# Altium PCB PCB1.PcbDoc (part 2 of 2)
Units mil, origin at the board's own origin, x right, y up, seen from the top; angles counter-clockwise.
Board outline 3110.24 x 2637.8 mil, 4 copper layers (Top Layer, GND, PWR, Bottom Layer), stack 30.634 mil thick; 256 components, 133 nets, 699 pads, 60 vias.
Unrouted connection lines stored in the file: 3.
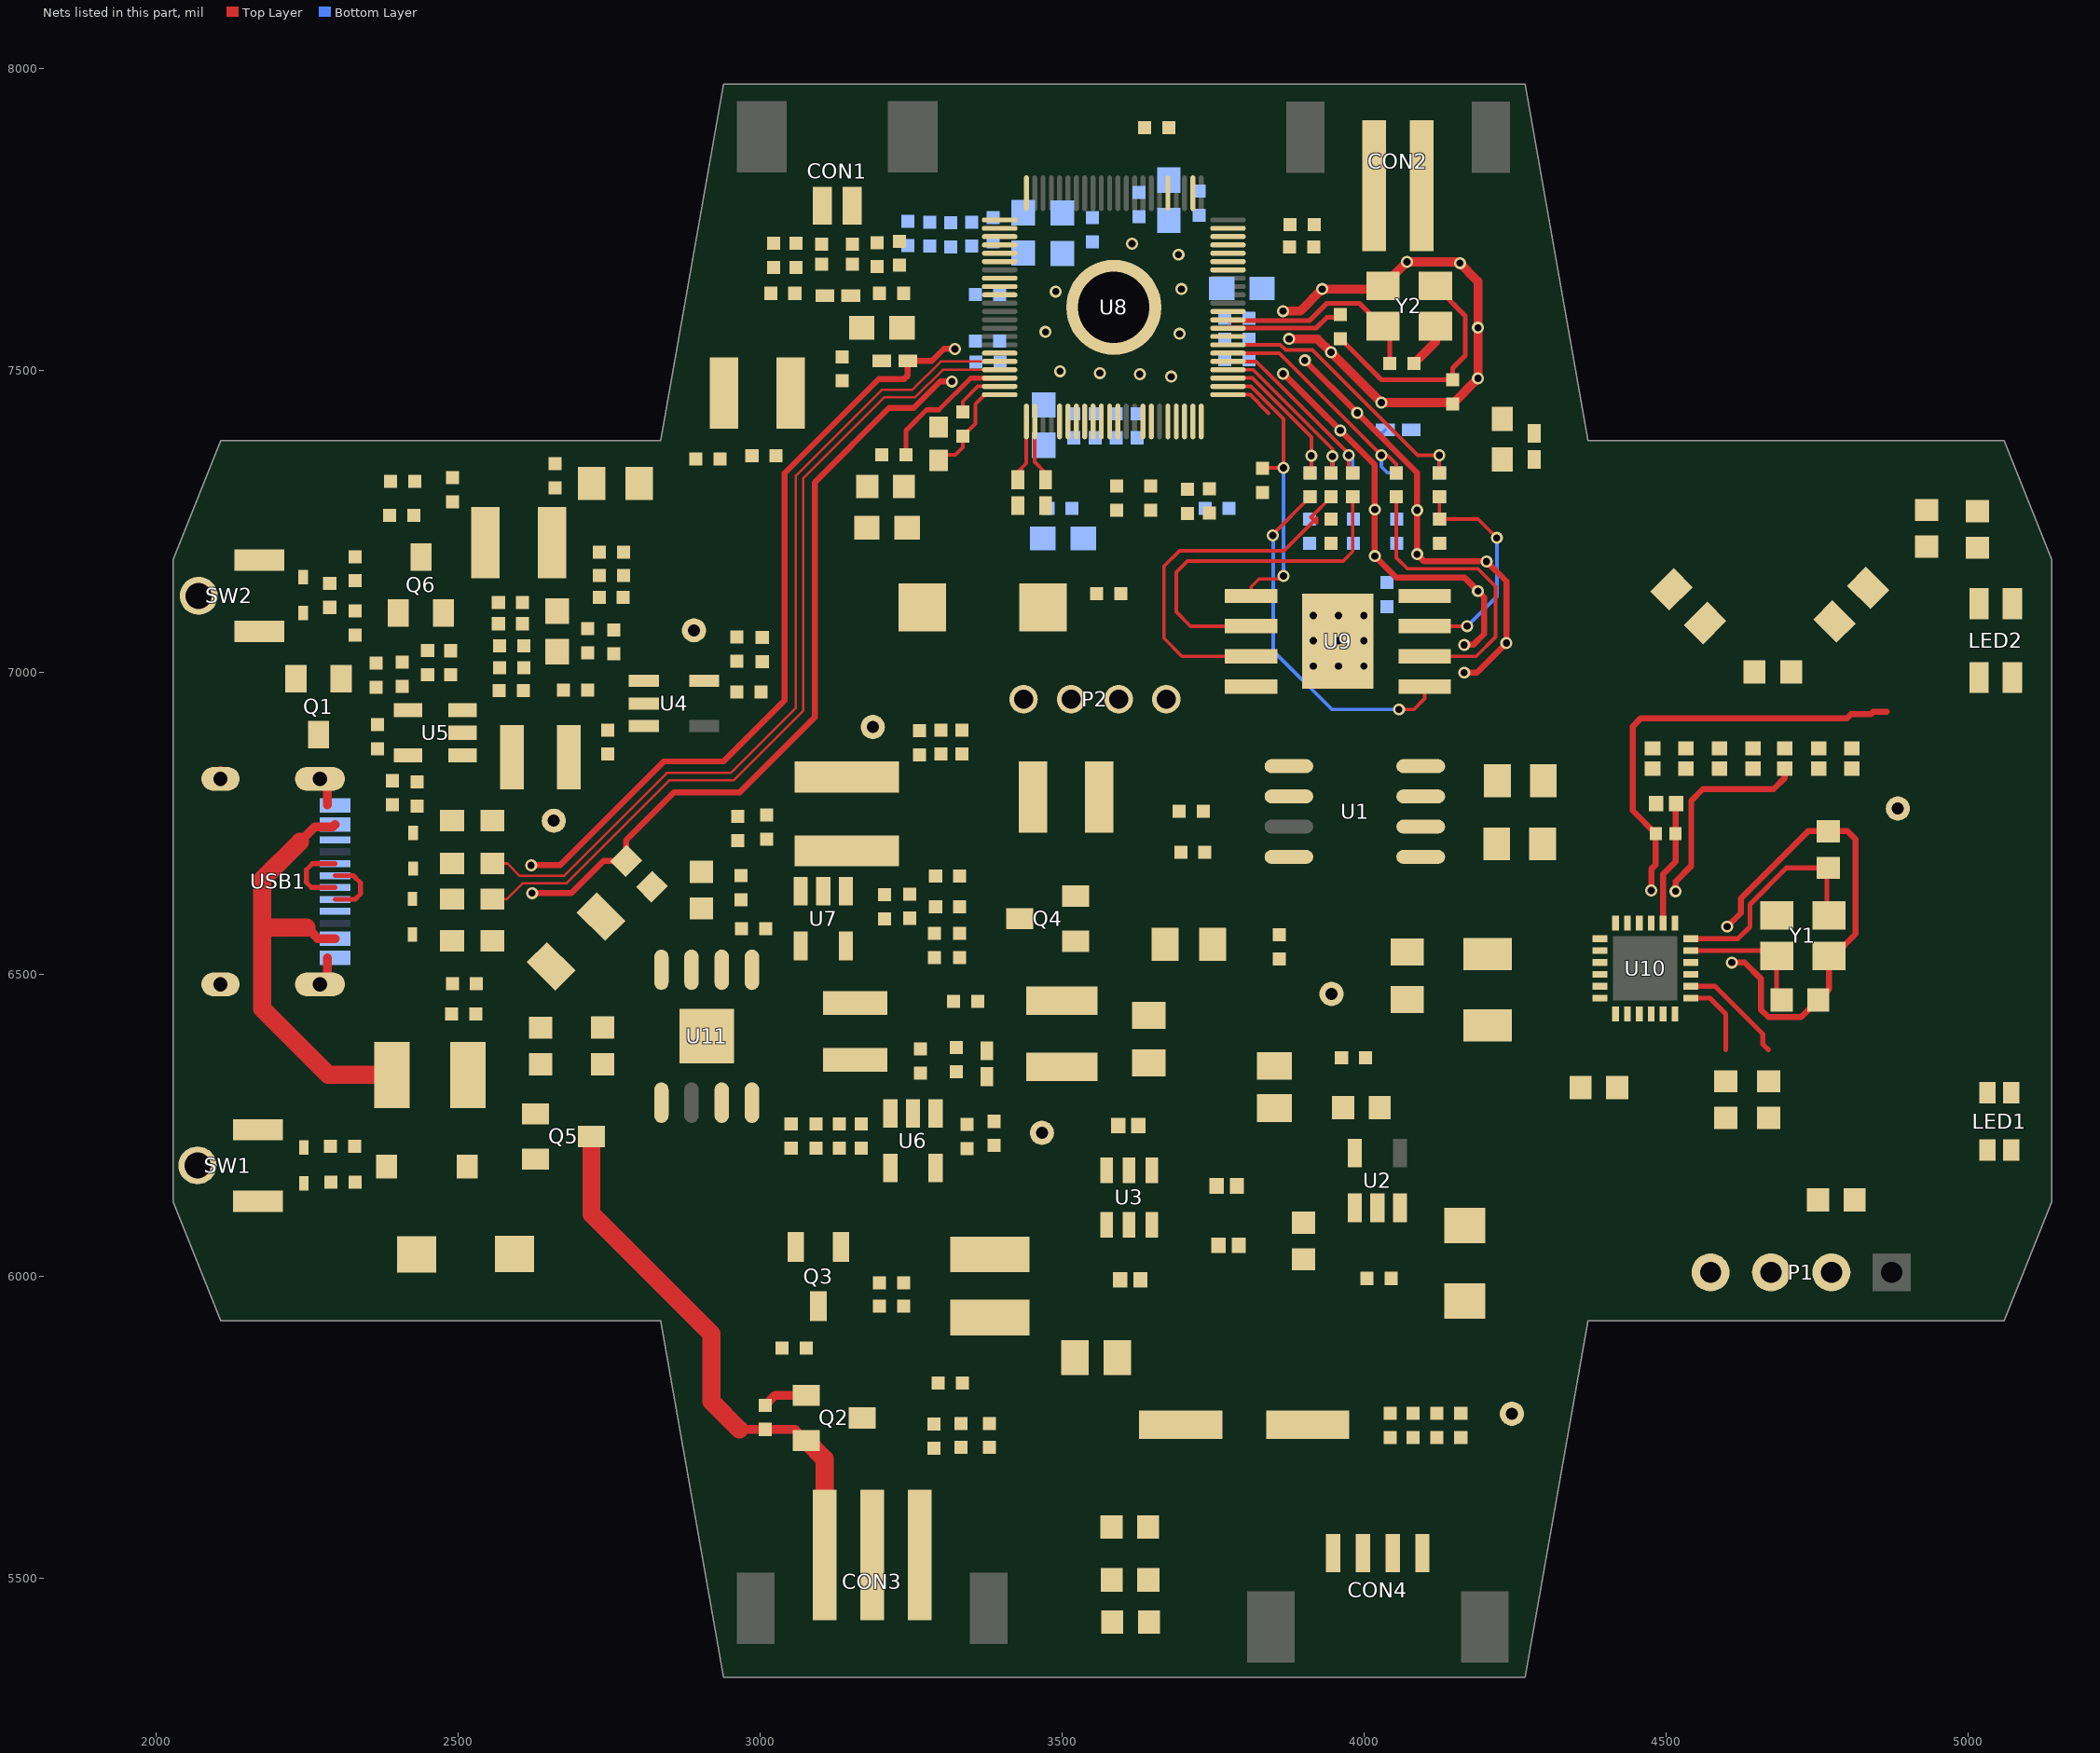
[diagram p4: the nets of this part, all layers, seen from the top]

## Part data
ANT1: library part CON1, "Connector"
C1: library part "CAP POL"
C2 C4 C5 C6 C50 C63 C64 C65 C66 C67 C68 C69 C70 C71 C72 C73 C76 C77 C78 C79 C80 C83 C84 C85 C86 C87 C89 C90 C91 C93 C94 C95 C96 C98 C99: library part C0805_10uF, Class=DISCRETE
C3 C7 C97 C102: library part C0402, Class=DISCRETE
  C97: BOM="CAP: 4.7uF, 0603"
C8 C9 C10 C11 C12 C14: library part CAP_0805, Add into BOM=yes, Convert to PCB=yes, Device=CAP_0805, Supplier Footprint=0805, Symbol=CapAcitance
C13: library part CAP_1206, Add into BOM=yes, Convert to PCB=yes, Device=CAP_1206, Supplier Footprint=1206, Symbol=CapAcitance
C15: library part Cap1, "无极电容"
C16 C103: library part Cap, "Capacitor", Published=8-Jun-2000, Publisher="Altium Limited", Revision="July-2002: Re-released for DXP Platform."
C17 C18 C19 C20 C21 C22 C23 C29 C30 C31: library part CAP, "Capacitor"
C24 C25 C26 C27 C104 C105: library part CAP
C28: library part RVT1A221M0605_C72494, Equivalent Series Resistance(ESR)=-, JLCPCB Part Class="Extended Part", Manufacturer Part=RVT1A221M0605, Rated Voltage=10V, Ripple Current=90mA@120Hz, =6.3mm, Add into BOM=yes, Convert to PCB=yes, Datasheet=https://atta.szlcsc.com/upload/public/pdf/source/20170325/1490427950282.pdf, Device=RVT1A221M0605_C72494, L=5.4mm, Supplier=LCSC, Supplier Footprint=SMD,D6.3xL5.4mm, Supplier Part=C72494, Symbol=RVT1A221M0605-C72494
C32 C33: library part CAP_0603, Add into BOM=yes, Convert to PCB=yes, Device=CAP_0603, Supplier Footprint=0603, Symbol=CapAcitance
C34 C35 C36 C37 C38 C39 C40 C41 C43 C44 C45 C48 C49 C51 C52 C53 C54 C55 C56 C57 C58 C59 C62 C74 C75 C81 C82 C88 C92 C101: library part C0402/100nF/10V/X7R, "[ 100nF(0.1uF),10V,X7R ](0402)", Part Name=0402B104K100C, Brand=WalsinµØ·, Class=Capacitor, Creator=Alan.Liu#6135/0920796617
C42 C46 C47 C60 C61 C100: library part "CAP NP2"
CON1 CON2: library part HC-1.25-2PLT, Current Rating (Max)=2A, JLCPCB Part Class="Extended Part", Add into BOM=yes, Convert to PCB=yes, Datasheet=https://atta.szlcsc.com/upload/public/pdf/source/20230707/8E5913B5A3195C18F5EE12EA4CB86B82.pdf, Device=HC-1.25-2PLT, Manufacturer Part=HC-1.25-2PLT, Number of Pins=2P, Number of PINs Per Row=2, Number of Rows=1, Pins Structure=1x2P, Pitch=1.25mm, Reference Series=-, Row Spacing=-, Supplier=LCSC, Supplier Footprint=SMD,P=1.25mm, Supplier Part=C2845388, Symbol=HC-1.25-2PLT
CON3: Current Rating (Max)=2A, JLCPCB Part Class="Extended Part", Add into BOM=yes, Comment_1=BX-PH2.0-3PZZ, Convert to PCB=yes, Datasheet=https://atta.szlcsc.com/upload/public/pdf/source/20231017/78B49E88B01779D5C268ECAB29020769.pdf, Device=BX-PH2.0-3PZZ, LCSC Part Name=BX-PH2.0-3PZZ, Manufacturer Part=BX-PH2.0-3PZZ, Number of Pins=3P, Number of PINs Per Row=3, Number of Rows=1, Pins Structure=1x3P, Pitch=2mm, Reference Series=PH, Row Spacing=-, Supplier=LCSC, Supplier Part=C18077745, Symbol=BX-PH2.0-3PZZ
CON4: library part HC-1.25-4PLT, Symbol=HC-1.25-4PLT
D1 D2: library part DIODE_Dup1
D3: library part TPNSR05F20NXT5G, Symbol=TPNSR05F20NXT5G
D4 D5 D9 D10: Breakdown Voltage=5.6V, Maximum Clamping Voltage=18.6V, Peak Pulse Current (Ipp)@10/1000us=9.4A, Reverse Stand-Off Voltage (Vrwm)=5V, Add into BOM=yes, Convert to PCB=yes, Datasheet=https://atta.szlcsc.com/upload/public/pdf/source/20171026/C136167_15089841930291059137.pdf, Device=LESD5Z5.0CT1G, Manufacturer Part=LESD5Z5.0CT1G, Supplier=LCSC, Supplier Footprint=SOD-523, Supplier Part=C136167, Symbol=LESD5Z5.0CT1G, Type=ESD
D6: library part DIODE
D7: library part SMF6.0A_C19077499, Breakdown Voltage=6.67V, JLCPCB Part Class="Extended Part", Maximum Clamping Voltage=10.3V, Peak Pulse Current (Ipp)@10/1000us=19.4A, Peak Pulse Power Dissipation (Ppp)@10/1000us=200W, Reverse Leakage Current (Ir)=400uA, Reverse Stand-Off Voltage (Vrwm)=6V, Add into BOM=yes, Convert to PCB=yes, Datasheet=https://atta.szlcsc.com/upload/public/pdf/source/20231201/BA209EB353689BD2A9785188AB9E10B0.pdf, Device=SMF6.0A_C19077499, LCSC Part Name=SMF6.0A, Manufacturer Part=SMF6.0A, Supplier=LCSC, Supplier Footprint=SOD-123FL, Supplier Part=C19077499, Symbol=SMF6.0A_C19077499, Type=TVS
D8: library part "Diode 1N4148", "High Conductance Fast Diode", Code_JEDEC=DO-204-AH, ComponentLink1Description="Manufacturer Link", ComponentLink1URL=http://www.fairchildsemi.com/, ComponentLink2Description=Datasheet, ComponentLink2URL=http://www.fairchildsemi.com/ds/1N%2F1N4148.pdf, DatasheetVersion=1997, LatestRevisionDate=17-Jul-2002, LatestRevisionNote="Re-released for DXP Platform.", PackageDescription="Diode, Axial; Body 3.8 x 1.9 mm (LxDia. max), Lead Dia. 0.53 mm (max)", PackageReference=DO-35, Published=8-Jun-2000, Publisher="Altium Limited"
F1: library part SMD1210B150TFT, Current Rating (Max)=100A, Hold Current=1.5A, Manufacturer Part="6V   2A", Operating Voltage (Max)=6V, Power Dissipation=800mW, Trip Current=3A, Add into BOM=yes, Convert to PCB=yes, Datasheet=https://atta.szlcsc.com/upload/public/pdf/source/20190124/C269169_A54EAE2455D8E3AD9881401F59298F09.pdf, Device=SMD1210B150TFT, Maximum Time to Trip=300ms, Supplier=LCSC, Supplier Footprint=1210, Supplier Part=C269165, Symbol=SMD1210B150TFT
FB1 FB2: library part BEAD, "BEAD/0402/120ohm/200MA", C1_Manu=SMT, C2_Type=BEAD, C3_Pkg=0402, C4_Unit=R, C5_Val=120, Class=DISCRETE, Fanvil_ID=INT.1013, Fanvil_Spec=0402-600Ω&100M/100mA/FBMA-11-100505-601T, Fanvil_Type=´ÅÖ, Part_Number=49223, Part_Type=0402ÌùÆ¬´
FB3 FB4: library part SMD_BEAD_FB0603, Current=2A
L1: library part CBW321609U601T, Current Rating=2A, Add into BOM=yes, Circuits=1, Convert to PCB=yes, Datasheet=https://atta.szlcsc.com/upload/public/pdf/source/20190129/C361676_507080CDC8DBC2B0B7C2139C1873642D.pdf, Device=CBW321609U601T, Manufacturer Part=600R, Supplier=LCSC, Supplier Footprint=1206, Supplier Part=C73732, Symbol=CBW321609U601T
L2 L3: library part SBK201209T-102Y-N, Current Rating=200mA, Add into BOM=yes, Circuits=1, Convert to PCB=yes, Datasheet=https://atta.szlcsc.com/upload/public/pdf/source/20181119/C285644_F4950E68CEB7BD9E18B05382B5272067.pdf, Device=SBK201209T-102Y-N, Supplier=LCSC, Supplier Footprint=0805, Supplier Part=C142036, Symbol=SBK201209T-102Y-N
  L2: Manufacturer Part=SBK201209T-102Y-N
  L3: Manufacturer Part="1K 0.5A"
L4 L5 L6: library part INDUCTOR
L7: library part SLW3012P1R5MST, Symbol=SLW3012P1R5MST
L8 L9 L10: library part CHOKE_4.7uH/4.1A-L8.0W8.0H4.0, "[ 4.7uH/4100mA ]; Inductance:4.7uH+-30%;Rated Current:4100mA;Self-resonant Frequency:30MHz;DC.Resistance:0.018R+-30%;", Part Name=NR8040T4R7N, Brand="TAIYO YUDEN¤Ó¶§»", Class=Choke, Creator=Alan.Liu#6135/0920796617
L11: library part L0603, Class=DISCRETE
LED1: library part TJ-S2012SW8TCGLC2R2G-A5, Symbol=TJ-S2012SW8TCGLC2R2G-A5
P1: library part "Header 4", "Header, 4-Pin", LatestRevisionDate=17-Jul-2002, LatestRevisionNote="Re-released for DXP Platform.", Publisher="Altium Limited"
P2: library part HEADER_1x4-2mm_1
Q1 Q2 Q6: library part JMTL3400A, BOM_JLCPCB Part Class="Extended Part", BOM_Manufacturer Part=JMTL3400A, BOM_Supplier=LCSC, BOM_Supplier Part=C2890442, Contributor=LCSC, spicePre=Q, spiceSymbolName=JMTL3400A
Q3: library part NPN_sot23, "NPN三极管"
Q4: library part AO3400_SOT23, BOM="N-Channel EMFET 2N7002 SOT23 <FAIRCHILD>", COST(NT$)=4.69
Q5: BOM_JLCPCB Part Class="Extended Part", BOM_Manufacturer=CJ, BOM_Manufacturer Part=CJ3401, BOM_Supplier=LCSC, BOM_Supplier Part=C13799, spicePre=Q, spiceSymbolName=CJ3401
R1 R2 R32 R34 R35 R36 R39 R41 R42 R44 R45 R46 R48 R49 R53 R55 R56 R57 R59 R61 R63 R65 R69 R83 R84 R85 R86 R87 R88: library part R-PIN-Mark
R3: library part R0402, Class=DISCRETE
R4 R5: library part Res_0805, Add into BOM=yes, Convert to PCB=yes, Device=Res_0805, Supplier Footprint=0805
R6 R16 R18 R19 R20 R23 R75: library part Res2, "Resistor", LatestRevisionDate=17-Jul-2002, LatestRevisionNote="Re-released for DXP Platform.", PackageReference=AXIAL-0.4, Published=8-Jun-2000, Publisher="Altium Limited"
R7 R11 R28 R29 R30 R31 R33 R37 R38 R40 R43 R47 R54 R67 R68 R70 R80 R82: library part R_Dup2
R8 R9 R10 R12 R24 R25 R26 R71 R73 R76 R77: library part Res_0603, Add into BOM=yes, Convert to PCB=yes, Device=Res_0603, Supplier Footprint=0603
R13 R14 R15 R17 R21 R22 R50 R51 R52 R72 R74: library part RES
R27 R58 R60 R62 R64 R66 R81: library part R_Dup1
R78 R79: library part Res1, "贴片电阻"
SW1 SW2: library part K2-1109SE-I4SW-04, Symbol=K2-1109SE-I4SW-04
TP1 TP2 TP3 TP4 TP5 TP6: library part "T POINT R"
U2: library part SSP7615-33M5R, Symbol=SSP7615-33M5R
U4: library part ADP1610_7
U5 U6: library part LDO,iD9306-AD,300mA_3, "iD9306-AD", Part Number=300035100G, Specification=SOT23,1.8V,ROHS
U7: library part LDO,iD9306-AD,300mA_4, "iD9306-AD", Part Number=300035100G, Specification=SOT23,1.8V,ROHS
U8: library part QFN_88P_20_2
U9: library part 24C08_3
U11: library part TP4056, "TP4056"
USB1: Current Rating - Power (Max)=5A, Add into BOM=yes, Connector Type=Type-C, Convert to PCB=yes, Datasheet=https://atta.szlcsc.com/upload/public/pdf/source/20221116/CF1C0058359F0761D6F7BB69303000BD.pdf, Device=HC-TYPE-C-16P-01A, Manufacturer Part=HC-TYPE-C-16P-01A, Number of Contacts=16P, Number of Ports=1, Standard=-, Supplier=LCSC, Supplier Footprint=SMD, Supplier Part=C2894897, Symbol=HC-TYPE-C-16P-01A
Y1: library part TAXM13.56M4RLBCCT2T, External load capacitor=20pF, JLCPCB Part Class="Extended Part", Add into BOM=yes, Convert to PCB=yes, Datasheet=https://atta.szlcsc.com/upload/public/pdf/source/20171225/C164051_15141924799131203407.pdf, Device=TAXM13.56M4RLBCCT2T, Manufacturer Part=TAXM13.56M4RLBCCT2T, Name=13.56MHz, Supplier=LCSC, Supplier Footprint=SMD3225-4P, Supplier Part=C164051
Y2: library part OSC-20MHz_HALF_4, BOM="DIP-OSC 20MHz  HALF <TXC>", Class=IC
LED2: Symbol=XL-A3528RGBC-BM
U1: Add into BOM=yes, Convert to PCB=yes, Datasheet=https://atta.szlcsc.com/upload/public/pdf/source/20210826/9C0306C24076E9EB95F6FF2952664B70.pdf, Device=NS4158, LCSC Part Name=NS4158, Manufacturer Part=NS4158, Supplier=LCSC, Supplier Footprint=SOIC-8, Supplier Part=C2890042, Symbol=NS4158
U3: Symbol=SY7069ADC

## Via types
v1: diameter 20, hole 12, Top Layer to Bottom Layer, tented both sides, 60 vias

## Nets (pads, with @x,y where several pads share a name; then routed paths per layer and width w, separated by ;. In a path a pad name is that pad's centre, name@x,y a point inside that pad or via, vN(x,y) a via of type N, cw(c..) or ccw(c..) an arc to the next point about the centre after c; other vN are vias at no path point)
1V0: C74.2 C75.2 C76.1 C77.1 C78.1 C79.1 C81.2 C82.2 C83.1 C84.1 C85.1 R40.2 U8.8 U8.12 U8.15 U8.46 U8.66 U8.67 U8.68 U8.76
1V5: C48.2 C49.2 C50.1 L9.2 R29.1 R35.1 TP5.1
1V5_NORMAL: C92.2 C93.1 C94.1 C95.1 C96.1 R29.2 R33.1 U8.6 U8.7 U8.9 U8.10 U8.18
1V8_NORMAL: C36.2 R27.2
3V3: C39.2 C40.2 C41.2 C45.2 C46.1 C47.1 L8.2 R28.1 R31.1 R34.1 TP4.1
3V3_BLE: C16.2 C24.1 C25.1 P1.2 R7.1 R8.1 R9.1 R24.2 TP1.1 U2.5 U10.13 U10.14 | length 310.7
  Top Layer w8: U10.13@4541.1,6460 4573,6460 4599,6434 4599,6374.32 ; U10.14@4541.1,6479.7 4581.3,6479.7 4660.5,6400.5 4660.5,6383.82 4670,6374.32
3V3_CPU: C61.1 C62.2 C63.1 C64.1 C65.1 C66.1 C67.1 C68.1 C69.1 C70.1 C71.1 C80.2 C87.2 C90.2 C91.2 FB3.1 FB4.2 R47.2 U8.11 U8.16 U8.30 U8.33 U8.40 U8.41 U8.49 U8.69 U8.83
3V3_FLASH: C99.1 C100.1 FB4.1 R67.1 R68.1 R70.1 R86.2 U9.8
3V3_NORMAL: C34.2 C42.1 C60.1 C86.1 D6.2 R1.1 R28.2 R37.2 R43.1 R47.1 R48.2 R54.1 R80.1 U4.1 U4.3
+5V_ULTRA: C31.2 CON4.1 R18.2 TP2.1 U3.3
AD_BAT: C27.2 R21.1 U10.5
AD_BAT_CON: R16.2 U8.74
AD_NTC: C105.2 R79.2
AD_NTC_CON: R78.1
AIN0: CON1.1 D1.2 FB1.1
AUD_VRM: C97.2 L11.2 U8.88 | length 172
  Top Layer w6: L11.2@3296,7359.88 3323.88,7359.88 3336,7372 C97.2@3336,7390.44 3357.1,7411.54 3357.1,7444 3372.2,7459.1 U8.88@3397.05,7459.1
AVDD_AUD: C88.2 C89.1 FB3.2 U8.86 | length 231.1
  Top Layer w8: C89.1@3242,7359.87 3242,7400 3276,7434 3296.46,7434 3349.12,7486.66 U8.86@3397.05,7486.66
BAT+: C103.1 CON3.1 Q2.2 Q5.3 R14.1 U11.5 | length 907
  Top Layer w15: 2966,5746 R14.1@3009,5746 3058.34,5746 Q2.2@3076.74,5727.6
  Top Layer w30: Q5.3@2721.26,6231 2721.26,6102.74 2920,5904 2920,5792 2966,5746 ; Q2.2@3076.74,5727.6 3107.26,5697.08 CON3.1@3107.26,5538
CHAR_G: LED1.3 U10.15
CHARG_EN: U10.11 U11.8
CHRG_R: LED1.1 U10.16
CHRG_STATE: U10.12 U11.7
DGND: C1.2 C2.2 C3.1 C7.2 C8.2 C9.1 C10.1 C12.1 C13.1 C14.1 C15.1 C16.1 C18.1 C19.1 C20.1 C21.1 C22.1 C23.1 C24.2 C25.2 C26.1 C27.1 C28.2 C29.1 C30.1 C31.1 C32.1 C33.1 C34.1 C35.1 C36.1 C37.1 C38.1 C39.1 C40.1 C41.1 C42.2 C43.1 C44.1 C45.1 C46.2 C47.2 C48.1 C49.1 C50.2 C51.1 C52.1 C53.1 C54.1 C55.1 C56.1 C57.1 C59.1 C60.2 C61.2 C62.1 C63.2 C64.2 C65.2 C66.2 C67.2 C68.2 C69.2 C70.2 C71.2 C72.1 C73.1 C74.1 C75.1 C76.2 C77.2 C78.2 C79.2 C80.1 C81.1 C82.1 C83.2 C84.2 C85.2 C87.1 C88.1 C89.2 C90.1 C91.1 C92.1 C93.2 C94.2 C95.2 C96.2 C98.1 C99.2 C100.2 C101.2 C102.2 C103.2 C104.1 C105.1 CON3.3 CON4.2 D1.1 D2.1 D3.2 D4.1 D5.1 D7.2 D9.1 D10.1 L11.1 LED2.1 P1.4 P2.2 Q1.2 Q3.2 Q4.2 Q6.2 R3.2 R4.2 R11.2 R13.1 R19.1 R20.2 R22.2 R23.1 R31.2 R33.2 R36.1 R39.1 R45.1 R49.1 R55.2 R59.2 R63.2 R69.1 R72.1 R75.1 R76.2 R77.2 R82.2 R87.2 R88.2 SW1.2 SW1.3 SW2.2 SW2.3 U1.7 U2.2 U3.4 U4.2 U5.2 U6.2 U7.2 U8.89 U9.4 U9.9 U10.7 U11.1 U11.3 U11.9 USB1.1 USB1.2 USB1.3 USB1.4 USB1.A1B12 USB1.B1A12 Y1.2 Y1.4 Y2.2 Y2.4 | length 6989.9
  Top Layer w10: v1(2621.44,6680) 2669,6680 2841,6852 2940,6852 3041,6953 3041,7329 3197,7485 3239,7485 3244.92,7490.92 C2.2@3244.92,7515 3284.75,7515 3304.75,7535 v1(3323,7535) ; v1(2623,6634) 2688,6634 2741.44,6687.44 C104.1@2778.56,6687.44 2778.56,6721.56 2858,6801 2966.8,6801 3091,6925.2 3091,7314 3214,7437 3254.84,7437 3298.84,7481 v1(3318,7481) ; v1(3866,7494) 3866.87,7494 4018,7342.87 v1(4018,7192) 4054,7156 4167,7156 4199,7124 4199,7063 4181,7045 v1(4166,7045) ; v1(3902.11,7516) v1(3989.11,7429) 4088,7330.11 v1(4088,7195) 4100,7183 v1(4203,7183) 4236,7150 v1(4236,7048) 4186.99,6998.99 v1(4166,6998.99) ; v1@4476,6638 v1(4475.7,6638.3) 4475.7,6673.7 4483.25,6681.25 D3.2@4483.25,6732.15 4445,6770.41 4445,6910 4458,6923 4799.2,6923 4806.2,6930 4839,6930 4843,6934 4866,6934 ; v1(4516.05,6637) 4516.05,6653.05 4542,6679 4542,6787 4561,6806 4678,6806 4697,6825 C20.1@4697,6840 ; v1(4601.5,6578.5) 4624,6601 4624,6625 4735.32,6736.32 C22.1@4769,6736.32 4800.68,6736.32 4814,6723 4814,6566 4778.07,6530.07 Y1.4@4770,6530.07 4770,6474.68 C23.1@4752.32,6457 4724.02,6428.71 4669.65,6428.71 4657,6441.36 4657,6492.54 4630.54,6519 v1(4609,6519)
  Top Layer w15: USB1.3@2107.12,6823.08 USB1.3@2107.12,6836.9 ; USB1.1@2271.7,6482.92 2284,6495.22 2284,6526.67 ; USB1.2@2271.7,6823.08 2284,6810.78 2284,6779.83 ; v1(3866,7597.5) 3894.5,7597.5 v1(3931,7634) 4026.22,7634 Y2.4@4031.69,7639.47 v1(4071.22,7679) 4157,7679 4189,7647 v1(4189,7486.02) C73.1@4147,7444.02 ; v1(3876,7551.53) 3884.3,7551.53 3884.5,7551.34 3923.59,7551.34 v1(3945.72,7529.21) v1(4028.93,7446) C73.1@4141.1,7446 ; C72.1@4083,7511 4118.31,7546.31 Y2.2@4118.31,7572.53 Y2.2@4119.85,7571
  other v1: 3916.2,7009.85 3958,7009.85 4000,7009.85 3916.2,7051.85 3958,7051.85 4000,7051.85 3916.2,7093.65 3958,7093.65 4000,7093.65 4189,7134 4088,7268 4018,7269 3960.87,7400 3681,7489 3629,7493 3563,7495 3497,7498 3695,7560 3473,7563 4189,7570 3490,7630 3698,7634 4159,7677 3693,7691 3616,7709
EN_+5V_ULTRA: R23.2 U3.1 U10.6
IRIN: R81.1 U8.19
KEY: C33.2 R24.1 R26.2 U10.4
LED_B: R50.2 U8.72
LED_G: R51.2 U8.71
LED_R: R52.2 U8.70
LINEOUT_L: C11.1 U8.5
MIC_BIAS0: C1.1 C2.1 R1.2 R2.1
MICCM0: C6.2 U8.2 | length 103.8
  Top Layer w6: U8.2@3455.12,7414.81 3455.12,7347.88 3473,7330 C6.2@3473,7318.46
MICIN0: C4.2 U8.1 | length 102.3
  Top Layer w6: C4.2@3427,7318.46 3427,7331 3441.34,7345.34 U8.1@3441.34,7414.81
NetANT1_1: ANT1.1 C21.2 L6.2
NetC3_2: C3.2 C4.1 C5.1 FB1.2 R2.2
NetC5_2: C5.2 C6.1 C7.1 FB2.2 R3.1
NetC9_2: C9.2 U1.2
NetC10_2: C10.2 CON2.2 L2.2
NetC11_2: C11.2 R5.1
NetC12_2: C12.2 C13.2 L1.2 U1.6
NetC14_2: C14.2 CON2.1 L3.2
NetC17_1: C17.1 D3.1 U10.20 | length 206.4
  Top Layer w10: U10.20@4495.4,6584.5 4495.4,6665.4 4516.05,6686.05 D3.1@4516.05,6732.15 4516.05,6781.05 C17.1@4517,6782
NetC17_2: C17.2 C18.2 L4.1
NetC19_2: C19.2 L4.2 L5.1
NetC20_2: C20.2 L5.2 L6.1
NetC26_2: C26.2 U10.8
NetC35_2: C35.2 R27.1 TP3.1 U4.5
NetC51_2: C51.2 R32.1 R37.1 U6.1
NetC52_2: C52.2 R30.1 R38.1 U5.1
NetC55_2: C55.2 C56.2 C57.2 C58.1 L10.2 R40.1 R42.1 TP6.1
NetC58_2: C58.2 R42.2 R44.2 R45.2 R46.2 U7.5
NetC59_2: C59.2 R41.1 R43.2 U7.1
NetC73_2: C73.2 R53.1 Y2.3 | length 398.5
  Top Layer w8: R53.1@3961.31,7551.53 4029,7483.85 4146.82,7483.85 C73.2@4147,7484.02 4147,7503 4168,7524 4168,7589.77 Y2.3@4118.31,7639.47
NetC97_1: C97.1 U8.87 | length 88.9
  Top Layer w6: C97.1@3336,7430.44 3336,7447.99 3360.89,7472.88 U8.87@3397.05,7472.88
NetC104_2: C104.2 R74.1 U11.4
NetCON1_2: CON1.2 D2.2 FB2.1
NetCON3_2: CON3.2 R78.2 R79.1
NetCON4_3: CON4.3 R9.2 R10.2
NetCON4_4: CON4.4 R8.2 R12.2
NetD4_2: D4.2 R25.1 SW1.1
NetD5_2: D5.2 R26.1 SW2.1
NetD6_1: D6.1 P2.1
NetD9_2: D9.2 R73.1 USB1.A6 USB1.B6 | length 111.4
  Top Layer w8: 2296.88,6623.47 2330,6623.47 2339,6632.47 2339,6651 2327.16,6662.84 2296.88,6662.84
NetD10_2: D10.2 R71.1 USB1.A7 USB1.B7 | length 123.4
  Top Layer w8: 2296.88,6643.16 2257.84,6643.16 2249.5,6651.5 2249.5,6672.5 2259.53,6682.53 2296.88,6682.53
NetF1_1: F1.1 USB1.A4B9 USB1.B4A9 | length 761.3
  Top Layer w15: 2238.95,6718.95 2263.8,6743.8 2293.19,6743.8 2296.88,6747.49 ; 2249.49,6577 2267.97,6558.51 2296.88,6558.51
  Top Layer w30: 2238.95,6718.95 2176,6656 2176,6578 ; 2249.49,6577 2177,6577 2176,6578 ; F1.1@2391,6333 2286,6333 2176,6443 2176,6578
NetL7_1: L7.1 U3.2
NetL8_1: L8.1 U5.3
NetL9_1: L9.1 U6.3
NetL10_1: L10.1 U7.3
NetLED1_2: LED1.2 LED1.4 R13.2
NetLED2_2: LED2.2 R50.1
NetLED2_3: LED2.3 R51.1
NetLED2_4: LED2.4 R52.1
NetP2_3: P2.3 R56.1
NetP2_4: P2.4 R54.2 R57.1
NetQ2_1: Q2.1 R14.2 R15.1 | length 74.5
  Top Layer w15: R14.2@3009,5786 3025.4,5802.4 Q2.1@3076.74,5802.4
NetQ2_3: Q2.3 R17.1
NetQ3_1: Q3.1 R16.1 R19.2
NetQ3_3: Q3.3 R15.2
NetQ4_3: Q4.3 R44.1 R49.2
NetQ6_3: Q6.3 R80.2 R81.2
NetR5_2: R5.2 U1.4
NetR6_2: R6.2 U2.3
NetR10_1: R10.1 U10.1
NetR12_1: R12.1 U10.2
NetR17_2: R17.2 R21.2 R22.1
NetR18_1: R18.1 R20.1 U3.6
NetR34_2: R34.2 R36.2 U5.5
NetR35_2: R35.2 R39.2 U6.5
NetR59_1: R59.1 R61.1
NetR63_1: R63.1 R65.1
NetR69_2: R69.2 U8.38 U8.39
NetR72_2: R72.2 U11.2
NetR83_1: R83.1 R86.1
NetR84_1: R84.1 R87.1
NetR85_1: R85.1 R88.1
NTC_AD: U10.9
NTC_CON: U10.10
PM_GPIO4: U8.23 | length 80.2
  Top Layer w6: U8.23@3775,7459.1 3811.9,7459.1 3842.5,7428.5
PM_RESET: C86.2 R55.1 U8.20
PM_SPI_CZ: R70.2 U8.24 U9.1 | length 486.8
  Top Layer w6: U8.24@3775,7472.88 3813.12,7472.88 3866.87,7419.13 v1(3866.87,7338) 3833,7338 R70.2@3832,7337 ; U9.1@3813.3,7126 3813.3,7140.92 3826.38,7154 3862,7154 v1(3866.87,7158.87)
  Bottom Layer w6: v1@3866,7158 v1(3866.87,7158.87) v1(3866.87,7338)
PM_SPI_DI: R60.1 R84.2 U8.25 | length 267.2
  Top Layer w6: U8.25@3775,7486.66 3815.01,7486.66 3913,7388.67 v1(3913,7358) 3913,7331.86 R60.1@3911.02,7329.87
  Bottom Layer w6: R84.2@3911.02,7329.87 3913,7331.86 v1(3913,7358)
PM_SPI_DO: R62.1 R65.2 U8.27 | length 329.1
  Top Layer w6: U8.27@3775,7514.22 3821.78,7514.22 3849,7487 ; 3849,7486.96 3858.96,7477 ; 3859,7477 3975,7361 v1(3975,7359) 3975,7336.38 R62.1@3981.51,7329.87
  Bottom Layer w6: v1(3975,7359) 3981.51,7352.49 R65.2@3981.51,7329.87
PM_SPI_HOLD: R66.1 R85.2 U8.29 | length 484
  Top Layer w6: U8.29@3775,7541.78 3861.71,7541.78 3870.49,7533 3915,7533 4089,7359 v1(4125,7359) R66.1@4125,7329.87
  Bottom Layer w6: R85.2@4125,7329.87 v1(4125,7359)
PM_SPI_SCK: C98.2 R58.1 R83.2 U8.28 | length 426.6
  Top Layer w6: U8.28@3775,7528 3860,7528 v1(4029,7359) 4039,7359 4053.85,7344.15 R58.1@4053.85,7329.87
  Bottom Layer w6: v1(4029,7359) 4029,7340 4039.13,7329.87 R83.2@4053.85,7329.87 ; C98.2@4029,7394.46 C98.2@4035.54,7401
PM_SPI_WPZ: R61.2 R64.1 U8.26 | length 295.5
  Top Layer w6: U8.26@3775,7500.44 3816.84,7500.44 3948,7369.28 v1(3948,7357) 3948,7331.9 R64.1@3945.97,7329.87
  Bottom Layer w6: R61.2@3945.97,7329.87 3948,7331.9 v1(3948,7357)
POWER_EN: R38.2 U10.24
RESET: C32.2 R25.2 U10.19
RX_SOC: U8.42 U10.22
SPI_FLASH-HOLD: R66.2 R68.2 U9.7 | length 381
  Top Layer w6: U9.7@4100.7,7076 v1(4171,7076) ; R66.2@4125,7289.87 4125,7253.49 R68.2@4125.49,7253 4189,7253 v1(4220,7222)
  Bottom Layer w6: v1(4171,7076) 4220,7125 v1(4220,7222)
SPI_FLASH-SCK: R58.2 U9.6 | length 498.8
  Top Layer w6: R58.2@4053.85,7289.87 4053.85,7189.15 4072,7171 4188.77,7171 4218,7141.77 4218,7058 4186,7026 U9.6@4100.7,7026
SPI_FLASH-SDI: R60.2 U9.5 | length 599.3
  Top Layer w6: v1(3849,7226) 3849,7227.86 R60.2@3911.02,7289.87 ; v1(4058,6938) 4082.7,6938 4100.7,6956 U9.5@4100.7,6976
  Bottom Layer w6: v1(3849,7226) 3849.87,7225.13 3849.87,7035.13 3947,6938 v1(4058,6938)
SPI_FLASH-SDO: R62.2 U9.2 | length 596.1
  Top Layer w6: U9.2@3813.3,7076 3713,7076 3689.37,7099.63 3689.37,7165.37 3708,7184 3966,7184 3981.51,7199.51 R62.2@3981.51,7289.87
SPI_FLASH-WPN: R64.2 R67.2 U9.3 | length 629.5
  Top Layer w6: U9.3@3813.3,7026 3699,7026 3669,7056 3669,7175 3695,7201 3867.7,7201 3921.7,7255 3921.7,7247.3 3912.55,7256.45 R64.2@3945.97,7289.87
SPK_OUTN: L3.1 U1.5
SPK_OUTP: L2.1 U1.8
SPK_SHDN: C8.1 R4.1 U1.1 U8.75
SWS: P1.3 U10.3
TX_SOC: U8.43 U10.23
UART_RX0: R56.2 U8.21
UART_TX0: R57.2 U8.22
USB5V_BAT+: C15.2 C28.1 C29.2 C30.2 C37.2 C38.2 C43.2 C44.2 C53.2 C54.2 D8.2 L1.1 L7.2 Q5.2 R6.1 R30.2 R32.2 R41.2 U2.1 U3.5 U5.4 U6.4 U7.4
USB_5V: C101.1 C102.1 D7.1 D8.1 F1.2 Q1.1 Q5.1 Q6.1 R11.1 R74.2 R75.2 R82.1
USB_CC1: R76.1 USB1.A5
USB_CC2: R77.1 USB1.B5
USB_DEC: Q1.3 R7.2 U10.21
USB_DM: R71.2 U8.84 | length 1426.2
  Top Layer w4: R71.2@2557.26,6683 2582,6683 2602.5,6662.5 2675.68,6662.5 2846.18,6833 2952,6833 3059.6,6940.6 3059.6,7324.97 3201.63,7467 3252.31,7467 3299.53,7514.22 U8.84@3397.05,7514.22
USB_DP: R73.2 U8.85 | length 1428
  Top Layer w4: R73.2@2557.26,6623.86 2580.86,6623.86 2607.5,6650.5 2680.65,6650.5 2851.15,6821 2956.97,6821 3071.6,6935.63 3071.6,7097.13 3071.6,7320 3206.6,7455 3257.28,7455 3302.72,7500.44 U8.85@3397.05,7500.44
VID_0: Q4.1 R46.1 R48.1
XC1: C22.2 U10.18 Y1.1 | length 378.3
  Top Layer w8: U10.18@4541.1,6558.4 4619.4,6558.4 4639,6578 4639,6615.11 4699.57,6675.69 C22.2@4766.69,6675.69 ; C22.2@4769,6675.69 C22.2@4766.69,6675.69 ; Y1.1@4770,6597 4766.69,6600.31 C22.2@4766.69,6675.69
XC2: C23.2 U10.17 Y1.3 | length 244.8
  Top Layer w8: U10.17@4541.1,6538.8 4670.88,6538.8 Y1.3@4683.38,6526.3 ; Y1.3@4683.38,6530.07 Y1.3@4683.38,6526.3 ; C23.2@4688.69,6444 4683.38,6449.31 Y1.3@4683.38,6526.3 ; Y1.3@4689.82,6519.85 Y1.3@4683.38,6526.3
XTALI: R53.2 U8.31 | length 195.7
  Top Layer w8: U8.31@3775,7569.34 3775.2,7569.53 3883.46,7569.53 3883.65,7569.34 3921.04,7569.34 3939.11,7587.41 3957.18,7587.41 R53.2@3961.31,7591.53
XTALO: C72.2 U8.32 Y2.1 | length 350.8
  Top Layer w8: U8.32@3775,7583.12 3776.12,7582 3910.1,7582 3938.46,7610.36 3992.64,7610.36 4030.47,7572.53 Y2.1@4031.69,7572.53 4043,7561.23 C72.2@4043,7511
pads on no net: CON1.3 CON1.4 CON2.3 CON2.4 CON3.4 CON3.5 CON4.5 CON4.6 P1.1 U1.3 U2.4 U4.4 U8.3 U8.4 U8.13 U8.14 U8.17 U8.34 U8.35 U8.36 U8.37 U8.44 U8.45 U8.47 U8.48 U8.50 U8.51 U8.52 U8.53 U8.54 U8.55 U8.56 U8.57 U8.58 U8.59 U8.60 U8.61 U8.62 U8.63 U8.64 U8.65 U8.73 U8.77 U8.78 U8.79 U8.80 U8.81 U8.82 U10.25 U11.6 USB1.A8 USB1.B8

## Polygon pours and split planes (outlines as drawn)
DGND on GND (split plane): 4351.47,7379.35 4351.52,7379.14 4351.55,7378.92 4352.05,7377.25 4352.53,7375.56 4352.63,7375.36 4352.69,7375.15 4353.52,7373.61 4354.31,7372.05 4354.44,7371.87 4354.55,7371.68 4355.66,7370.32 4356.74,7368.95 4356.91,7368.8 4357.05,7368.63 4358.4,7367.52 4359.73,7366.38 4359.92,7366.27 4360.09,7366.13 4361.63,7365.31 4363.16,7364.45 4363.37,7364.38 4363.57,7364.28 4365.24,7363.77 4366.91,7363.22 4367.13,7363.2 4367.34,7363.13 4369.08,7362.96 4370.82,7362.75 4371.04,7362.77 4371.26,7362.75 5046.63,7362.75 5118.88,7182.12 5118.88,6126.87 5046.63,5946.25 4371.26,5946.25 4371.04,5946.23 4370.82,5946.24 4369.08,5946.03 4367.34,5945.86 4367.13,5945.8 4366.91,5945.77 4365.24,5945.23 4363.57,5944.72 4363.37,5944.61 4363.16,5944.55 4361.63,5943.69 4360.09,5942.86 4359.92,5942.72 4359.73,5942.61 4358.4,5941.47 4357.05,5940.36 4356.91,5940.19 4356.74,5940.05 4355.66,5938.67 4354.55,5937.32 4354.44,5937.12 4354.31,5936.95 4353.52,5935.39 4352.69,5933.84 4352.63,5933.63 4352.53,5933.43 4352.05,5931.75 4351.55,5930.07 4351.52,5929.85 4351.47,5929.64 4250.26,5355.7 2956.82,5355.7 2855.62,5929.64 2855.56,5929.85 2855.53,5930.07 2855.03,5931.75 2854.55,5933.43 2854.45,5933.63 2854.39,5933.84 2853.56,5935.39 2852.77,5936.95 2852.64,5937.12 2852.53,5937.32 2851.42,5938.67 2850.34,5940.05 2850.17,5940.19 2850.03,5940.36 2848.68,5941.47 2847.35,5942.61 2847.16,5942.72 2846.99,5942.86 2845.45,5943.69 2843.92,5944.55 2843.71,5944.61 2843.51,5944.72 2841.84,5945.23 2840.17,5945.77 2839.95,5945.8 2839.74,5945.86 2838,5946.03 2836.26,5946.24 2836.04,5946.23 2835.82,5946.25 2121.08,5946.25 2048.83,6126.87 2048.83,7182.12 2121.08,7362.75 2835.82,7362.75 2836.04,7362.77 2836.26,7362.75 2838,7362.96 2839.74,7363.13 2839.95,7363.2 2840.17,7363.22 2841.84,7363.77 2843.51,7364.28 2843.71,7364.38 2843.92,7364.45 2845.45,7365.31 2846.99,7366.13 2847.16,7366.27 2847.35,7366.38 2848.68,7367.52 2850.03,7368.63 2850.17,7368.8 2850.34,7368.95 2851.42,7370.32 2852.53,7371.68 2852.64,7371.87 2852.77,7372.05 2853.56,7373.61 2854.39,7375.15 2854.45,7375.36 2854.55,7375.56 2855.03,7377.25 2855.53,7378.92 2855.56,7379.14 2855.62,7379.35 2956.82,7953.3 4250.26,7953.3
no net on PWR (split plane): 4351.47,7379.35 4351.52,7379.14 4351.55,7378.92 4352.05,7377.25 4352.53,7375.56 4352.63,7375.36 4352.69,7375.15 4353.52,7373.61 4354.31,7372.05 4354.44,7371.87 4354.55,7371.68 4355.66,7370.32 4356.74,7368.95 4356.91,7368.8 4357.05,7368.63 4358.4,7367.52 4359.73,7366.38 4359.92,7366.27 4360.09,7366.13 4361.63,7365.31 4363.16,7364.45 4363.37,7364.38 4363.57,7364.28 4365.24,7363.77 4366.91,7363.22 4367.13,7363.2 4367.34,7363.13 4369.08,7362.96 4370.82,7362.75 4371.04,7362.77 4371.26,7362.75 5046.63,7362.75 5118.88,7182.12 5118.88,6126.87 5046.63,5946.25 4371.26,5946.25 4371.04,5946.23 4370.82,5946.24 4369.08,5946.03 4367.34,5945.86 4367.13,5945.8 4366.91,5945.77 4365.24,5945.23 4363.57,5944.72 4363.37,5944.61 4363.16,5944.55 4361.63,5943.69 4360.09,5942.86 4359.92,5942.72 4359.73,5942.61 4358.4,5941.47 4357.05,5940.36 4356.91,5940.19 4356.74,5940.05 4355.66,5938.67 4354.55,5937.32 4354.44,5937.12 4354.31,5936.95 4353.52,5935.39 4352.69,5933.84 4352.63,5933.63 4352.53,5933.43 4352.05,5931.75 4351.55,5930.07 4351.52,5929.85 4351.47,5929.64 4250.26,5355.7 2956.82,5355.7 2855.62,5929.64 2855.56,5929.85 2855.53,5930.07 2855.03,5931.75 2854.55,5933.43 2854.45,5933.63 2854.39,5933.84 2853.56,5935.39 2852.77,5936.95 2852.64,5937.12 2852.53,5937.32 2851.42,5938.67 2850.34,5940.05 2850.17,5940.19 2850.03,5940.36 2848.68,5941.47 2847.35,5942.61 2847.16,5942.72 2846.99,5942.86 2845.45,5943.69 2843.92,5944.55 2843.71,5944.61 2843.51,5944.72 2841.84,5945.23 2840.17,5945.77 2839.95,5945.8 2839.74,5945.86 2838,5946.03 2836.26,5946.24 2836.04,5946.23 2835.82,5946.25 2121.08,5946.25 2048.83,6126.87 2048.83,7182.12 2121.08,7362.75 2835.82,7362.75 2836.04,7362.77 2836.26,7362.75 2838,7362.96 2839.74,7363.13 2839.95,7363.2 2840.17,7363.22 2841.84,7363.77 2843.51,7364.28 2843.71,7364.38 2843.92,7364.45 2845.45,7365.31 2846.99,7366.13 2847.16,7366.27 2847.35,7366.38 2848.68,7367.52 2850.03,7368.63 2850.17,7368.8 2850.34,7368.95 2851.42,7370.32 2852.53,7371.68 2852.64,7371.87 2852.77,7372.05 2853.56,7373.61 2854.39,7375.15 2854.45,7375.36 2854.55,7375.56 2855.03,7377.25 2855.53,7378.92 2855.56,7379.14 2855.62,7379.35 2956.82,7953.3 4250.26,7953.3

## Other copper
Top Layer:
  region net DGND: 5104.73,6922.12 5104.73,6941.8 4818,6941.8 4818,6922.12
  region net NetANT1_1: 4815,6849.28 4815,6829.6 5101.63,6829.6 5101.63,6849.28
  rectangle: 5093.45,6737.3 5113.13,6941.8
  region: 4958.73,6756.99 4958.73,6737.3 5112.93,6737.3 5112.93,6756.99
  rectangle: 4955.55,6646.8 4975.23,6756.9
  region: 4955.53,6665.39 4955.53,6645.7 5112.23,6645.7 5112.23,6665.39
  rectangle: 5093.33,6555.4 5113.02,6665.5
  region: 4956.53,6574.19 4956.53,6554.5 5113.03,6554.5 5113.03,6574.19
  rectangle: 4955.55,6464.1 4975.23,6574.2
  region: 4955.53,6482.59 4955.53,6462.9 5113.43,6462.9 5113.43,6482.59
  rectangle: 5093.75,6371.2 5113.43,6481.7
  region: 5097.83,6665.5 5097.83,6645.77 5113.03,6645.77 5113.03,6665.5
  region: 4903.73,6390.89 4903.73,6371.2 5113.43,6371.2 5113.43,6390.89

## Silkscreen, mask and mechanical layers (free items; w line width, h text height)
Mechanical 1:
  drawing of 2571 lines, arcs and shapes, not listed
Mechanical 3:
  lines w0.5: 6888.74,13756.67 7231.39,13990.54 ; 6929.83,14830.09 7221.36,14596.22 ; 8718.1,20419.09 9060.75,20429.54 ; 8759.18,21269.09 9050.71,21035.22 ; 10325.67,13725.8 10939.22,14126.14 10325.67,14513.2 ; 10557.92,14538.91 10599.61,14764.66 ; 12155.03,20164.8 12768.58,20565.14 12155.03,20952.2 ; 12387.28,20977.91 12428.97,21203.66 ; 13881.93,20177.94 14224.58,20411.81 ; 15771.46,13308.77 16209.24,13474.99 ; 16115.42,12937.02 16553.19,13103.24 ; 16853.36,20876.62 17196.01,21379.4 ; 18419.92,19663.1 18857.7,19829.32 ; 18624.36,16275.94 19062.14,16442.16 ; 18763.87,19291.35 19201.65,19457.57 ; 19231.88,15448.13 19669.66,15614.35 ; 19250.13,13309.1 19687.9,13475.32 ; 19306.93,14539.89 19744.71,14706.11 ; 19534.47,14239.69 19972.25,14405.91 ; 21272.82,22630.27 21710.6,22796.49 ; 21880.34,21802.46 22318.12,21968.68 ; 21898.58,19663.43 22336.36,19829.65 ; 21955.39,20894.22 22393.16,21060.44 ; 22182.93,20594.02 22620.7,20760.24
  text "喇叭}" at 21768.83,22882.99 h27.5
  text "i16.86879;{\fSimSun|b1|i0|c134|p2;正面" at 9857.93,22543.28 h27.5
  text "i16.8688;{\fSimSun|b1|i0|c134|p2;反面" at 15016.99,22394.4 h27.5
  text "立式端子：喇叭2.0-2P，咪头1.25-2P，超声波板：4P}" at 9990.91,22257.87 h27.5
  text "除Type-C外，电池中间不能有其他元件}" at 14875.93,22165.88 h27.5
  text "超声波}" at 22409.41,22064.47 h27.5
  text "开关4.5*4.5*9mm}" at 8433.3,21602.75 h27.5
  text "18650电池}" at 16976.87,21548.94 h27.5
  text "导光柱}" at 12335.15,21366.77 h27.5
  text "LED}" at 22495.99,21101.47 h27.5
  text "咪头}" at 22723.53,20801.27 h27.5
  text "LED}" at 12800.83,20614.95 h27.5
  text "Type-C" at 7958.23,20519.23 h27.5
  text "卧贴 6.8mm" at 7958.23,20419.82 h27.5
  text "Type-C" at 13356.32,20241 h27.5
  text "卧贴 6.8mm" at 13356.32,20141.59 h27.5
  text "18650*1}" at 22439.19,19870.68 h27.5
  text "按键}" at 18071.08,19696.87 h27.5
  text "Type-C}" at 18361.22,19222.25 h27.5
  text "技术要求：" at 8382.49,19105.56 h27.5
  text "尺寸可1：1导入" at 8382.49,18906.74 h27.5
  text "板厚1.0mm,端子丝印标记" at 8382.49,18807.33 h27.5
  text "紫色为线路板轮廓" at 8382.49,18707.92 h27.5
  text "白色为元器件位置" at 8382.49,18608.51 h27.5
  text "蓝色为塑料件覆盖区域" at 8382.49,18509.1 h27.5
  text "喇叭}" at 19120.37,16528.66 h27.5
  text "i16.86879;{\fSimSun|b1|i0|c134|p2;正面" at 8028.57,16104.28 h27.5
  text "i16.8688;{\fSimSun|b1|i0|c134|p2;反面" at 12905.94,15955.4 h27.5
  text "立式端子：喇叭2.0-2P，咪头1.25-2P，超声波板：4P}" at 8161.56,15818.87 h27.5
  text "除Type-C外，电池中间不能有其他元件}" at 12764.89,15726.88 h27.5
  text "超声波}" at 19760.95,15710.14 h27.5
  text "开关4.5*4.5*9mm}" at 6603.94,15163.75 h27.5
  text "导光柱}" at 10505.79,14927.77 h27.5
  text "LED}" at 19847.54,14747.14 h27.5
  text "咪头}" at 20075.07,14446.94 h27.5
  text "LED}" at 10971.47,14175.95 h27.5
  text "Type-C" at 6363.12,13819.73 h27.5
  text "卧贴 6.8mm" at 6363.12,13720.32 h27.5
  text "18650*1}" at 19790.73,13516.35 h27.5
  text "Type-C}" at 15712.76,12867.92 h27.5
  text "技术要求：" at 8740.49,12666.56 h27.5
  text "尺寸可1：1导入" at 8740.49,12467.74 h27.5
  text "板厚1.0mm,端子丝印标记" at 8740.49,12368.33 h27.5
  text "紫色为线路板轮廓" at 8740.49,12268.92 h27.5
  text "白色为元器件位置" at 8740.49,12169.51 h27.5
  text "蓝色为塑料件覆盖区域" at 8740.49,12070.1 h27.5